# Altium PCB mini_ups.PcbDoc
Units mm, origin at the board's own origin, x right, y up, seen from the top; angles counter-clockwise.
Board outline 99.37 x 79.45 mm, 2 copper layers (Top Layer, Bottom Layer); 18 components, 15 nets, 54 pads, 0 vias.
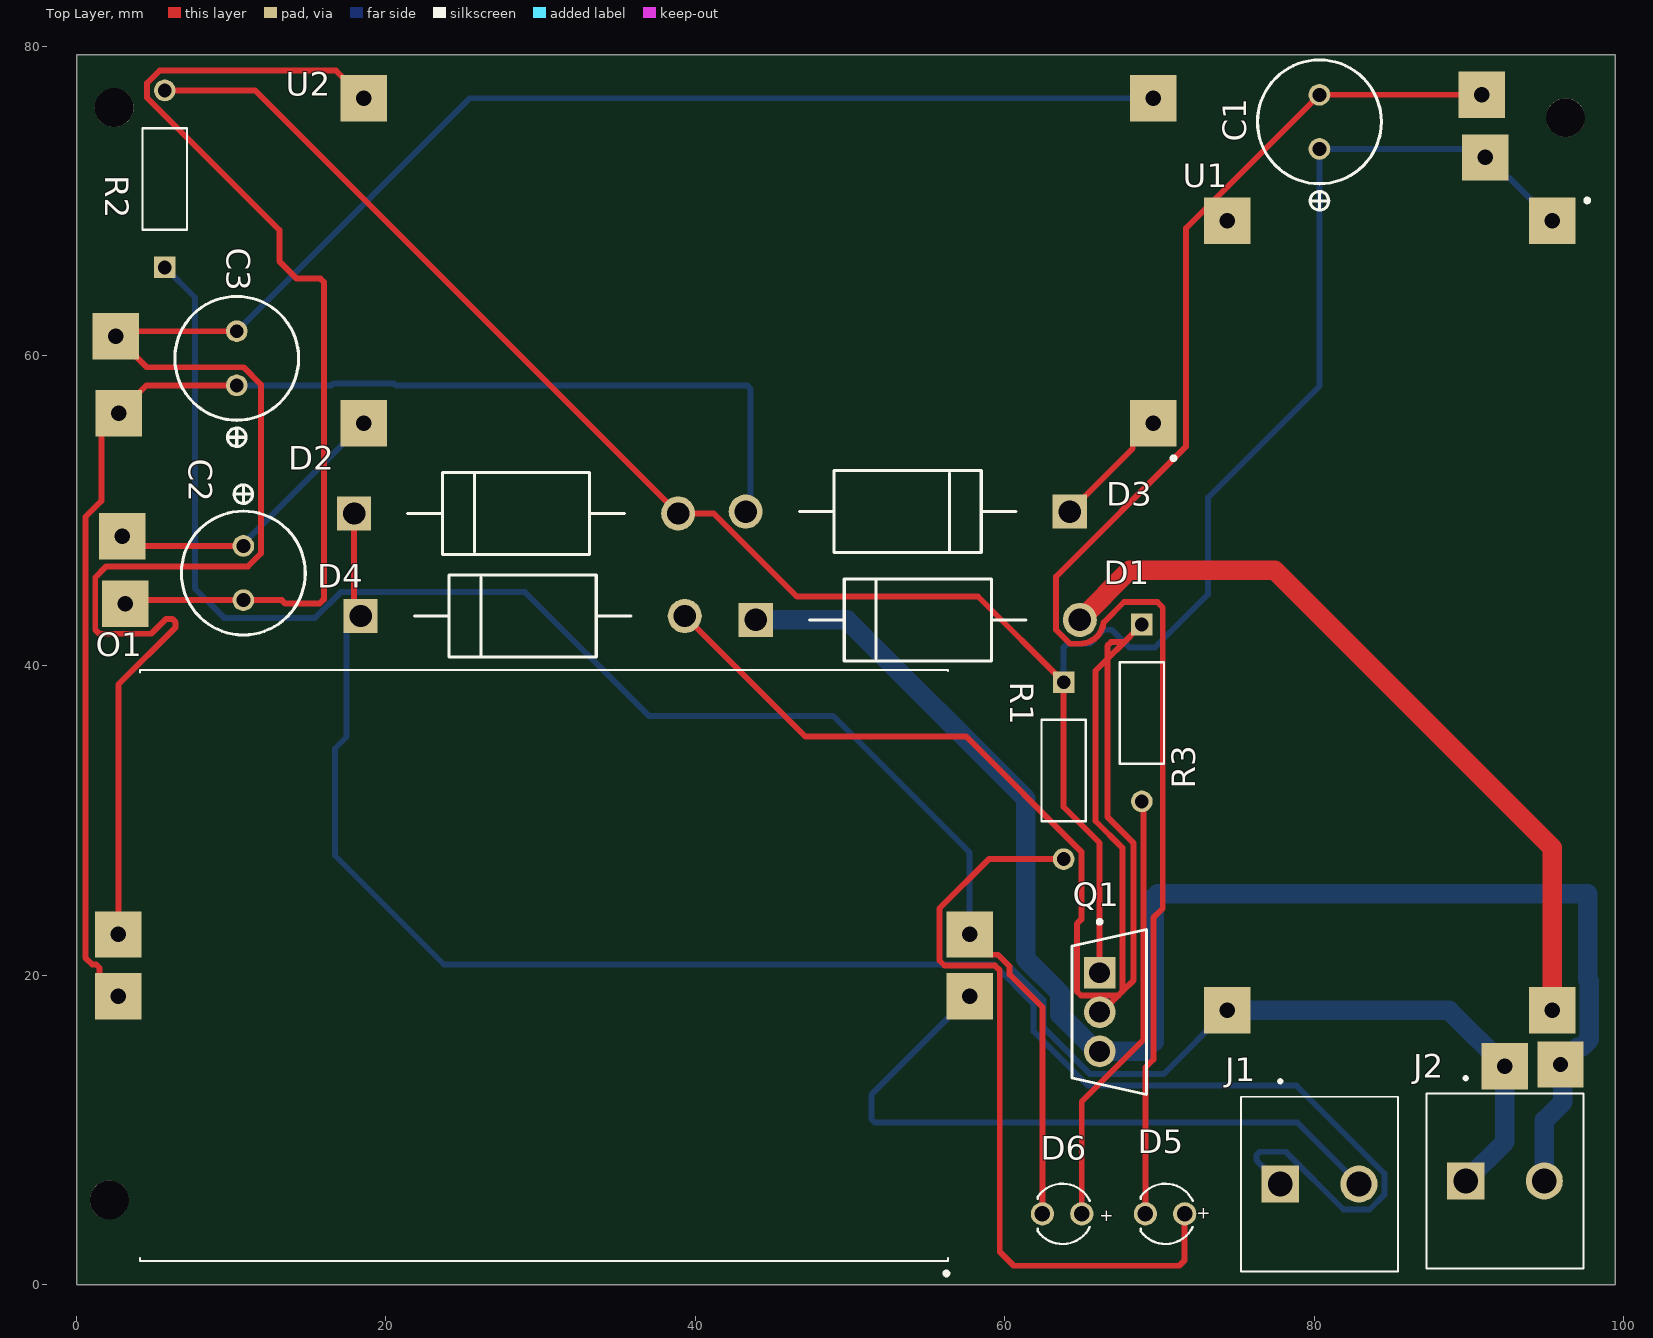
[diagram p0: Top Layer view]
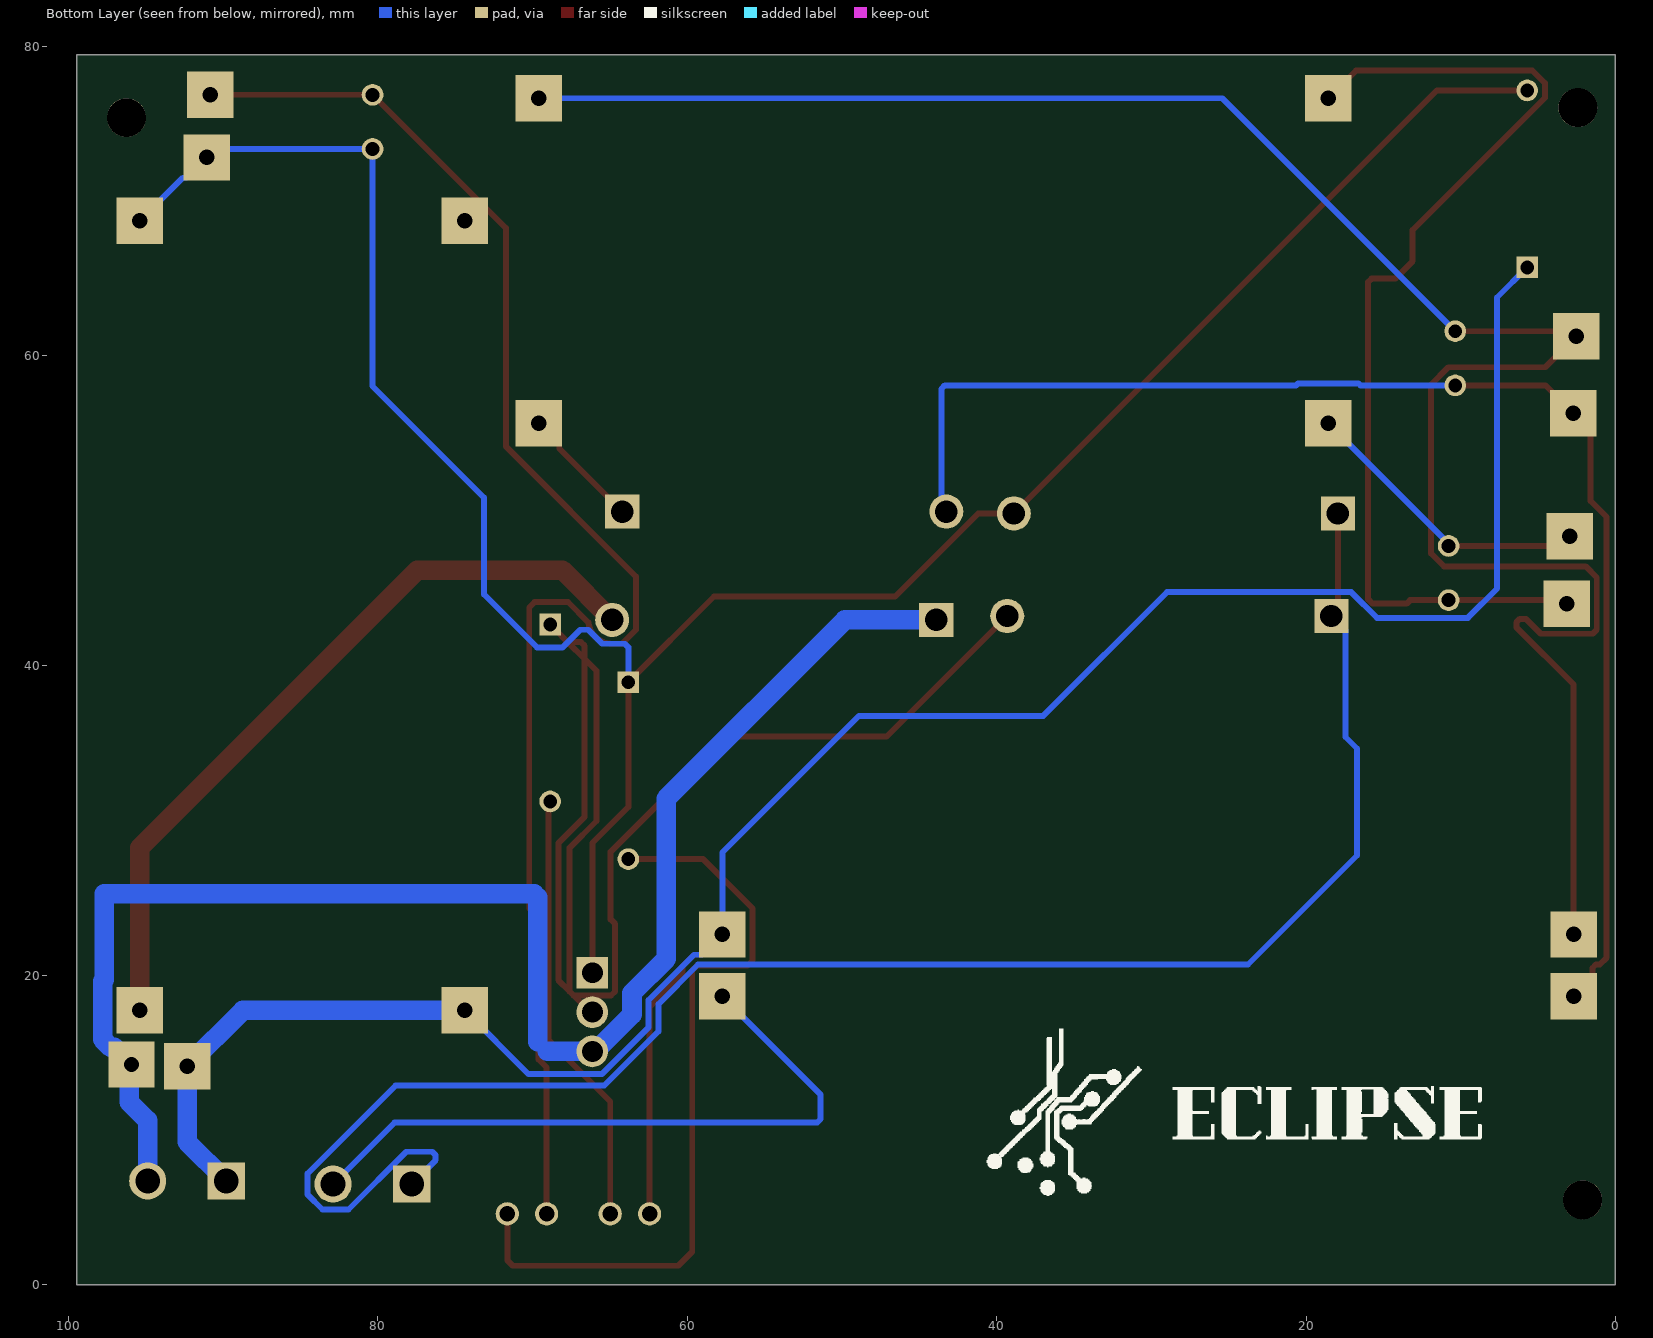
[diagram p1: Bottom Layer view, seen from below]
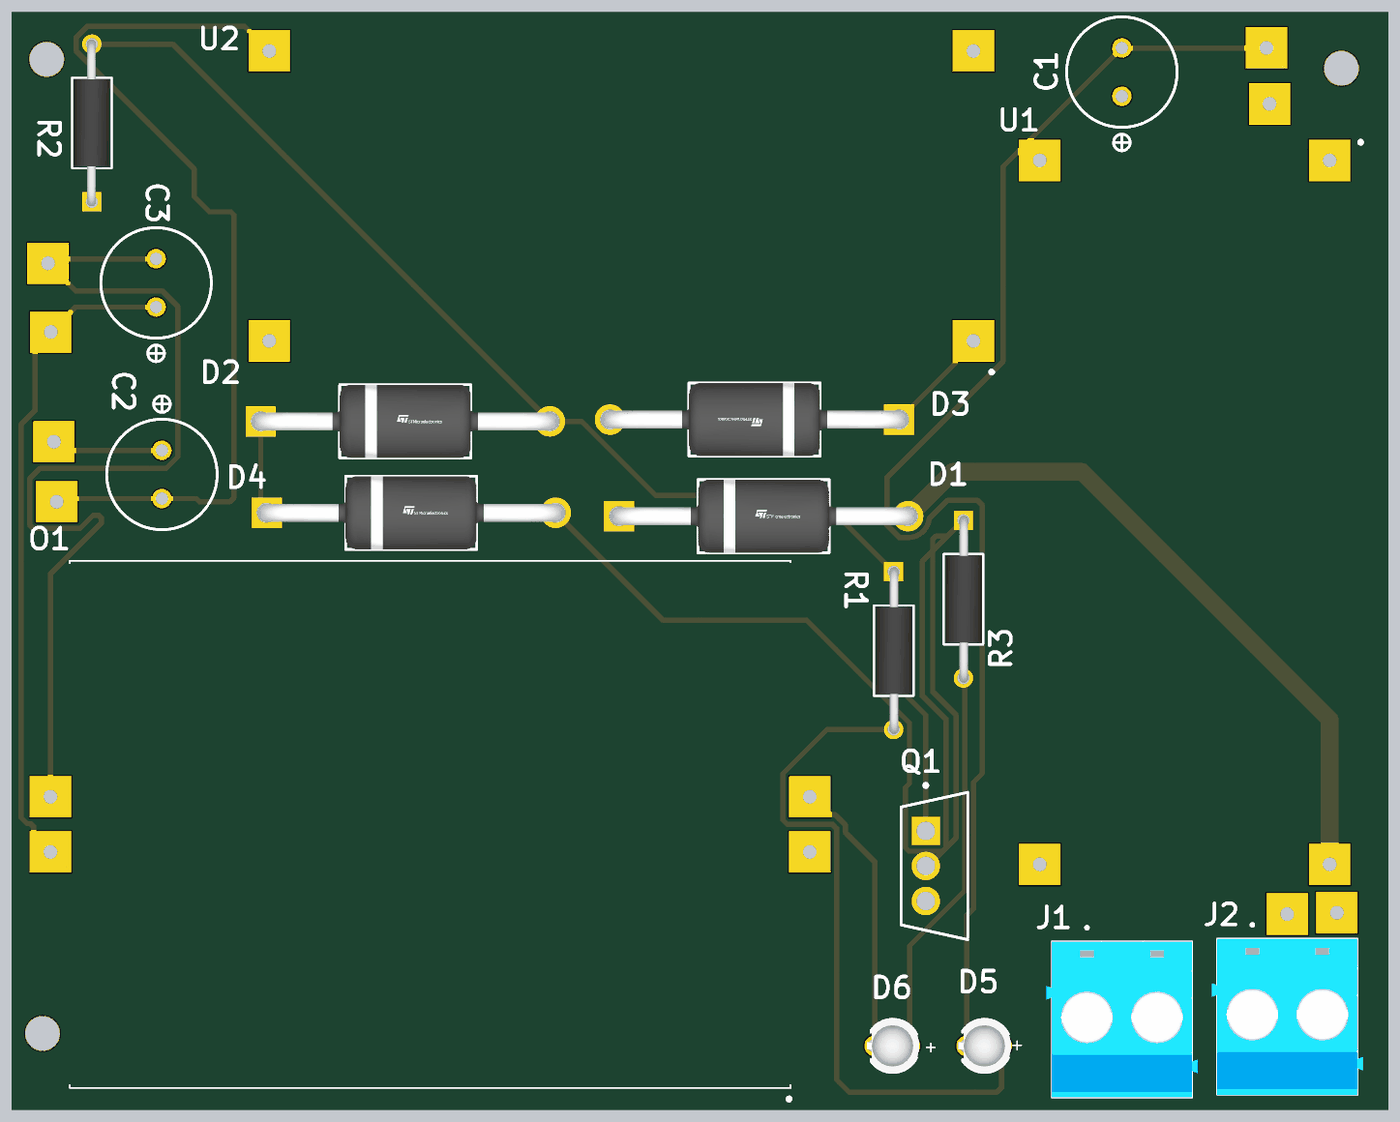
[diagram p2: 3D render of the assembled board from above, using the file's embedded part models]

## Layer stack, top to bottom
Top Solder: solder mask 0.0102, Solder Resist, Dk 3.5
Top Layer: signal copper 0.035
Dielectric 1: dielectric 0.32, FR-4, Dk 4.8
Bottom Layer: signal copper 0.035
Bottom Solder: solder mask 0.0102, Solder Resist, Dk 3.5

## Board outline
0.05,79.45 99.425,79.45 99.425,0 98.325,0 0.05,0

## Design rules (kind name [scope] priority, off if disabled: settings)
Clearance Clearance_1 [OnMid vs OnMid] p1: gap=0.254 ignorepadtopadclearanceinfootprint=FALSE sourcerule=37 cellrowname=All cellrowtype=0 cellcolname=All cellcoltype=0 innerlayers=TRUE
Clearance Clearance_2 [(ExistsOnLayer('Top Layer') Or ExistsOnLayer('Bottom Layer')) vs (ExistsOnLayer('Top Layer') Or ExistsOnLayer('Bottom Layer'))] p2: gap=0.254 ignorepadtopadclearanceinfootprint=FALSE sourcerule=37 cellrowname=All cellrowtype=0 cellcolname=All cellcoltype=0 outerlayers=TRUE
Clearance [All] p3: gap=0.254 ignorepadtopadclearanceinfootprint=FALSE ismatrix=TRUE
HoleToHoleClearance [All] p1: gap=0.5 allowstackedmicrovias=TRUE
PolygonConnect [All] p1: connectstyle=Relief reliefconductorwidth=0.254 reliefentries=4 polygonreliefangle="90 Angle" airgapwidth=0.254
RoutingVias [All] p1: holewidth=0.711 width=1.27 viastyle="Through Hole" minholewidth=0.711 minwidth=1.27 maxholewidth=0.711 maxwidth=1.27
SilkToSolderMaskClearance [IsPad] p1: minsilkscreentomaskgap=0.16 clearancetoexposedcopper=TRUE
SolderMaskExpansion [All] p1: expansion=0.102 istentingtop=FALSE
Width MaxMinWidth_1 [All] p1: maxlimit=1.27 minlimit=0.254 preferedwidth=0.381 minimp=50.000000 maximp=50.000000 favimp=50.000000
Width [All] p2: maxlimit=0.254 minlimit=0.254 preferedwidth=0.254
28 further rules are at their usual default settings.

## Components (designator, comment, footprint, x,y, rotation, side; value= is the part's Value field where it differs from the comment)
C1 "EEU-FR1C102L" PNSC-FR-A-8X20-2_V 80.325,75.125 r90 top
C2 "EEU-FR1C102L" PNSC-FR-A-8X20-2_V 10.8,45.975 r270 top
C3 "EEU-FR1C102L" PNSC-FR-A-8X20-2_V 10.375,59.85 r90 top
D1 "1N5822" FP-DO-201AD-MFG 54.375,42.95 r0 top
D2 "1N5822" FP-DO-201AD-MFG 28.425,49.825 r0 top
D3 "1N5822" FP-DO-201AD-MFG 53.725,49.95 r180 top
D4 "1N5822" FP-DO-201AD-MFG 28.85,43.2 r0 top
D5 "151033RS03000" WL-TMRW_D3.9H10.5 70.35,4.575 r180 top
D6 "151033RS03000" WL-TMRW_D3.9H10.5 63.7,4.575 r180 top
J1 "TB010-508-02BE" CUI_TB010-508-02BE 77.795,6.5 r0 top
J2 "TB010-508-02BE" CUI_TB010-508-02BE 89.775,6.7 r0 top
O1 "Boost converter" BOOST 30.225,20.625 r180 top
Q1 "AUIRF9540N" FP-TO-220AB-MFG 66.745,17.61 r0 top
R1 "680 ohm" STA_CF14_STP 63.8,38.925 r270 top
R2 "10k" STA_CF14_STP 5.725,65.725 r90 top
R3 "470 ohm" STA_CF14_STP 68.85,42.65 r270 top
U1 "Buck converter" BUCK 84.875,43.225 r270 top locked
U2 "Buck converter" BUCK 44.075,66.15 r180 top locked

## Footprints (in the part's own frame and the unit in brackets; to place one, negate y for a bottom-side part, rotate by r counter-clockwise, add the part's x,y. Pads: shape width x height; smd on the part's side, far side on the other; paste and mask are expansions set on the pad)
BOOST [mm] "Boost converter module,Body52x38mm"
  rect 3x3 hole 1: 1(-27.5,2) 2(-27.5,-2) 3(27.5,-2) 4(27.5,2)
  silkscreen extent -26.12,-19.1 26.1,20.02
BUCK [mm] "Buck converter,Body54x23 mm"
  rect 3x3 hole 1: 1(-25.5,10.5) 2(-25.5,-10.5) 3(25.5,-10.5) 4(25.5,10.5)
  silkscreen extent -26.95,12.63 -26.7,12.87
CUI_TB010-508-02BE [mm]
  rect 2.4x2.4 / inner round 2.4 / far side rect 2.4x2.4 hole 1.6: 1(0,0)
  round 2.4 hole 1.6: 2(5.08,0)
  silkscreen extent -2.54,-5.66 7.62,6.74, body extent -2.94,-5.66 8.02,5.64, height 18.2
FP-DO-201AD-MFG [mm]
  rect 2.2x2.2 hole 1.45 paste-2539.97 mask+0: 1(-10.47,0)
  round 2.2 hole 1.45 paste-2539.97 mask+0: 2(10.47,0)
  silkscreen extent -7,-2.65 7,2.65, body extent -11.67,-2.75 11.67,2.75, height 0.25
FP-TO-220AB-MFG [mm]
  rect 2.05x2.05 hole 1.35 paste-2539.97 mask+0: 1(-0.62,2.54)
  round 2.05 hole 1.35 paste-2539.97 mask+0: 2(-0.62,0) 3(-0.62,-2.54)
  silkscreen extent -2.41,-5.34 2.41,5.96
PNSC-FR-A-8X20-2_V [mm] "Radial Lead, 2-Leads, Dia 8mm, Body Length 22mm, Pin Spacing 3.5mm"
  round 1.4 hole 0.9: 1(-1.75,0) 2(1.75,0)
  silkscreen extent -5.7,-4 4,4, body extent -3.97,-3.99 4,3.99, height 22
STA_CF14_STP [mil]
  rect 55x55 / inner round 60 / far side rect 55x55 hole 35 paste-99999 mask+0: 1(0,0)
  round 55 / inner round 60 / far side round 55 hole 35 paste-99999 mask+0: 2(450,0)
  silkscreen extent 96,-56 354,57, body extent -12,-50 462,52, height 103
WL-TMRW_D3.9H10.5 [mm] "THT Mono-color Round LED, 2-leads"
  round 1.5 hole 1: 1(1.27,0) 2(-1.27,0)
  silkscreen extent -1.79,-1.95 1.57,1.95, body extent -1.97,-1.95 1.85,1.95, height 10.55

## Part data
C1 C2 C3: library part CMP-0744-00002-1, "Aluminum Electrolytic Capacitor, 1000 uF +/- 20%, 16 V, -40 to 105 degC, 2-Pin THD, Dia 8 mm, Body Length 22 mm, RoHS", Capacitance="1000 uF", Manufacturer=Panasonic, Rated Ripple Current="1560 mA", Rated Voltage="16 V", Resistance="0.03 Ohm", Temperature Range="-40 to 105 degC", Tolerance="+/- 20%", ComponentLink1Description="Manufacturer URL", ComponentLink1URL=http://www.panasonic.com/industrial/electronic-components/, ComponentLink2Description=Datasheet, ComponentLink2URL=http://www.panasonic.com/industrial/includes/pdf/EEU-FR_DataSheet.pdf, DatasheetVersion=Apr-10, Mounting Technology="Through Hole", PackageDescription="2-Pin Radial Lead, Dia 8 mm, Body Length 22 mm, Pin Spacing 3.5 mm", PackageReference=FR-A-8X20-2, PartNumber=EEU-FR1C102L, RoHS=TRUE
D1 D2 D3 D4: library part CMP-12187-000025-1, "DIODE SCHOTTKY 40V 3A DO201AD", Forward Current=3A, Manufacturer=STMicroelectronics, Max Junction Temp=+150°C, Max Repetitive Reverse Voltage=40V, Max Surge Forward Current=80A, Package=DO-201AD, Peak Reverse Current=2mA, Temperature="to +150°C", Automotive=No, Category=Diode, ComponentLink2Description=Datasheet, ComponentLink2URL=https://www.st.com/resource/en/datasheet/1n5822.pdf, Device Class L1="Discrete Semiconductors", Device Class L2=Diodes, Device Class L3="Schottky Diodes", Digikey Description="DIODE SCHOTTKY 40V 3A DO201AD", Height=5.3mm, Lead Free=Yes, Manufacturer Part Number=1N5822, Mouser Description="Schottky Diodes & Rectifiers Vr/40V Io/3A BULK", Octopart=https://octopart.com/1n5822-stmicroelectronics-323225, RoHS=TRUE, Temperature Range High=+150°C
D5 D6: library part CMP-1489-00004-2, Case/Package=Radial, Color=Red, Forward Current=100mA, Forward Voltage=2V, Max Operating Temperature=85°C, Max Reverse Voltage (DC)=5V, Min Operating Temperature=-40°C, Test Current=20mA, Dominant Wavelength=621nm, Height=5.3mm, Length=3mm, Lens Size=3mm, Lens Style="Circular, Clear, Round", Luminous Intensity=2.6cd, Mount="Through Hole", NexarPartId=29717810, Packaging=Bulk, Peak Wavelength=628nm, REACH SVHC=Unknown, RoHS=Compliant, Viewing Angle=30°, Wavelength=621nm, Width=3mm
J1 J2: "2~24 Poles, Screw Type, Horizontal, 5.08 Pitch, 26~12 (AWG), Terminal Block Connector", Package=None, Availability="In Stock", Check_prices=https://www.snapeda.com/parts/TB010-508-02BE/CUI+Devices/view-part/?ref=eda, CUI_purchase_URL=https://www.cuidevices.com/product/interconnect/connectors/terminal-blocks/tb010-508-series?utm_source=snapeda.com&utm_medium=referral&utm_campaign=snapedaBOM, MF="CUI Devices", MP=TB010-508-02BE, Price=None, Purchase-URL=https://pricing.snapeda.com/search/part/TB010-508-02BE/?ref=eda, SnapEDA_Link=https://www.snapeda.com/parts/TB010-508-02BE/CUI+Devices/view-part/?ref=snap
O1: library part Boost, "Boost converter module"
Q1: library part CMP-00196-74197148-1, "AUIRF9540N Automotive Q101 -100V Single P-Channel HEXFET Power MOSFET in a TO-220AB Package", Case/Package=TO-220AB, Continuous Drain Current (ID)=-23A, Drain to Source Breakdown Voltage=-100V, Drain to Source Resistance=117mΩ, Gate to Source Voltage (Vgs)=20V, Input Capacitance=1.3nF, Max Junction Temperature (Tj)=175°C, Max Power Dissipation=140W, Min Operating Temperature=-55°C, Package Quantity=1000, Threshold Voltage=-2V, Drain to Source Voltage (Vdss)=-100V, Fall Time=51ns, Height=16.51mm, Length=10.66mm, Lifecycle Status=Obsolete, Max Operating Temperature=175°C, Mount="Through Hole", NexarPartId=74197148, Number of Elements=1, Number of Pins=3, On-State Resistance=117mΩ, Power Dissipation=140W, Radiation Hardening=No, REACH SVHC="No SVHC", Rise Time=67ns, RoHS=Compliant, Turn-Off Delay Time=51ns, Turn-On Delay Time=15ns, Width=4.82mm
R1 R3: library part CF14JT10K0, "No Description Available", Mfr_Name="Stackpole International"
R2: library part CF14JT10K0, "RES 10K OHM 5% 1/4W AXIAL", Mfr_Name="Stackpole International", Supplier Part Number 1=CF14JT10K0CT-ND, Supplier 1=Digikey
U1 U2: library part Buck, "Buck converter module"

## Free pads (board coordinates)
  rect 3x3 hole 1: 26(2.975,48.35) 27(3.175,44) 28(2.55,61.275) 29(2.75,56.3) 30(91.025,72.825) 32(95.9,14.225) 33(92.3,14.125) 34(90.8,76.875)
  round 2.5 hole 2.5: 35(96.225,75.4) 36(2.45,76.05) 37(2.15,5.475)

## Nets (pads, with @x,y where several pads share a name; then routed paths per layer and width w, separated by ;. In a path a pad name is that pad's centre, name@x,y a point inside that pad or via, vN(x,y) a via of type N, cw(c..) or ccw(c..) an arc to the next point about the centre after c; other vN are vias at no path point)
NetC1_1: C1.1 D2.2 pad.30 Q1.1 R1.1 R2.2 U1.1 | length 156.4
  Top Layer w0.381: R2.2 11.565,77.155 D2.2 41.196,49.825 46.566,44.455 58.27,44.455 R1.1 63.8,30.863 66.125,28.538 Q1.1
  Bottom Layer w0.381: R2.2 R2.2@5.749,77.179 ; R1.1 63.8,41.143 63.8,41.182 64.023,41.405 65.485,41.405 66.389,42.31 66.909,42.31 68.044,41.175 69.7,41.175 73.123,44.598 73.123,50.848 80.325,58.05 C1.1 90.475,73.375 pad.30 92.334,71.515 92.584,71.515 U1.1
NetC1_2: C1.2 D5.1 pad.34 U1.2 | length 100.4
  Top Layer w0.381: D5.1 69.08,14.03 69.595,14.545 69.595,23.697 70.2,24.302 70.2,43.75 69.85,44.1 67.7,44.1 66.38,42.78 cw(c64.845,42.95) 65.015,41.415 64.931,41.405 64.205,41.405 63.3,42.31 63.3,45.747 71.715,54.162 71.715,68.265 C1.2 pad.34
NetC2_1: C2.1 pad.26 U2.4 | length 19.2
  Top Layer w0.381: pad.26 3.6,47.725 C2.1
  Bottom Layer w0.381: C2.1 10.8,47.875 U2.4
NetC2_2: C2.2 pad.27 U2.3 | length 67.2
  Top Layer w0.381: pad.27 3.4,44.225 C2.2 13.288,44.225 13.513,44 15.725,44 16,44.275 16,64.777 15.777,65 14.25,65 13.125,66.125 13.125,68.139 4.582,76.682 4.582,77.628 5.404,78.45 16.775,78.45 U2.3
NetC3_1: C3.1 D3.2 O1.4 pad.29 | length 89.9
  Top Layer w0.381: O1.4 1.511,19.839 1.511,20.457 1.288,20.68 1.041,20.68 0.596,21.126 0.596,49.599 1.625,50.629 1.625,55.175 2.5,56.05 2.5,56.55 pad.29 4.55,58.1 C3.1
  Bottom Layer w0.381: C3.1 16.498,58.1 16.628,58.229 20.522,58.229 20.652,58.1 43.35,58.1 43.573,57.877 43.573,50.268 D3.2
NetC3_2: C3.2 O1.3 pad.28 U2.2 | length 137.2
  Top Layer w0.381: O1.3 2.725,38.775 6.425,42.475 6.425,42.791 6.202,43.014 5.817,43.014 4.859,42.055 1.491,42.055 1.231,42.316 1.231,45.684 1.952,46.406 11.099,46.406 11.944,47.251 11.944,58.149 10.824,59.27 4.555,59.27 pad.28 2.875,61.6 C3.2
  Bottom Layer w0.381: C3.2 25.425,76.65 U2.2
NetD1_1: D1.1 J2.2 pad.32 Q1.3 | length 102.2
  Bottom Layer w0.381: 69.02,15.07 69.65,15.7 ; 69.65,25.027 69.873,25.25 ; pad.32 pad.32@96.05,14.075 ; 97.652,25.25 97.875,25.027
  Bottom Layer w1.27: D1.1 49.8,42.95 61.35,31.4 61.35,21.053 63.568,18.835 63.568,17.46 65.958,15.07 69.02,15.07 ; 69.65,15.7 69.65,25.027 ; 69.873,25.25 97.652,25.25 97.652,19.705 97.764,19.593 97.764,15.857 97.243,15.336 97.011,15.336 pad.32 ; J2.2 94.855,10.605 96.05,11.8 pad.32@96.05,14.075
NetD1_2: D1.2 U1.4 | length 49.8
  Top Layer w1.27: D1.2 68.062,46.167 77.433,46.167 95.375,28.225 U1.4
NetD2_1: D2.1 D4.1 J1.1 | length 114.5
  Top Layer w0.381: D2.1 17.955,43.625 D4.1
  Bottom Layer w0.381: D4.1 17.471,42.29 17.471,35.38 16.725,34.635 16.725,27.725 23.77,20.68 59.298,20.68 61.854,18.125 61.854,16.365 65.354,12.865 78.835,12.865 84.52,7.181 84.52,5.819 83.556,4.855 81.879,4.855 78.147,8.587 76.47,8.587 76.247,8.364 76.247,8.048 J1.1
NetD3_1: D3.1 U2.1 | length 7.9
  Top Layer w0.381: D3.1 68.265,54.02 68.265,54.341 U2.1
NetD4_2: D4.2 Q1.2 R3.1 | length 96.7
  Top Layer w0.381: D4.2 47.11,35.41 57.501,35.41 64.943,27.968 64.943,23.598 64.655,23.311 64.655,18.941 64.916,18.68 67.334,18.68 ; Q1.2 66.264,17.61 67.334,18.68 ; R3.1@68.498,42.904 R3.1@68.498,42.298 ; R3.1 R3.1@68.498,42.298 ; 66.625,40.425 66.625,41.275 66.859,41.509 67.709,41.509 ; 66.625,40.425 66.625,30.225 68.325,28.525 68.325,19.671 67.594,18.941 ; 66.625,40.425 67.709,41.509 ; 66.625,40.425 65.863,39.663 65.863,29.962 67.594,28.231 67.594,18.941 ; 67.334,18.68 67.594,18.941 ; 67.709,41.509 R3.1@68.498,42.298
NetD5_2: D5.2 R1.2 | length 50.5
  Top Layer w0.381: R1.2 58.966,27.495 55.781,24.309 55.781,20.941 56.096,20.625 59.354,20.625 59.669,20.309 59.669,2.129 60.573,1.225 71.275,1.225 71.62,1.57 D5.2
NetD6_1: D6.1 J2.1 O1.2 pad.33 R2.1 U1.3 | length 156.7
  Top Layer w0.381: O1.2 59.034,21.315 59.561,21.315 60.304,20.572 60.304,20.045 62.43,17.92 D6.1
  Bottom Layer w0.381: R2.1 7.675,63.775 7.675,44.968 9.562,43.08 15.432,43.08 17.096,44.745 29.001,44.745 36.995,36.75 48.9,36.75 57.725,27.925 O1.2 59.034,21.315 59.561,21.315 62.489,18.388 62.489,16.628 65.516,13.6 70.25,13.6 U1.3
  Bottom Layer w1.27: U1.3 88.7,17.725 pad.33 92.3,9.225 J2.1
NetD6_2: D6.2 R3.2 | length 28.3
  Top Layer w0.381: D6.2 64.97,11.837 68.96,15.827 68.96,31.11 R3.2
NetJ1_2: J1.2 O1.1 | length 43.8
  Bottom Layer w0.381: O1.1 51.375,12.275 51.375,10.698 51.598,10.475 78.9,10.475 J1.2

## Silkscreen, mask and mechanical layers (free items; w line width, h text height)
Bottom Overlay:
  drawing of 15 lines, arcs and shapes, not listed
Outline:
  lines w0.125: 99.075,0.1 0.05,0.1 -0.025,0.025 ; -0.025,0.025 -0.025,79.325 99.275,79.325 99.55,79.05 99.55,0.575 99.55,0.1 99.45,0 98.975,0 0,0 -0.025,0.025

## Text inside footprints (layer, text, board x,y; h text height)
D5: Top Overlay "+" at 73.3,4.925 h0.8 r180
D6: Top Overlay "+" at 67.05,4.775 h0.8 r180